# EAGLE board IO4-IR-Detector-Active_array (EAGLE 7.7.0)
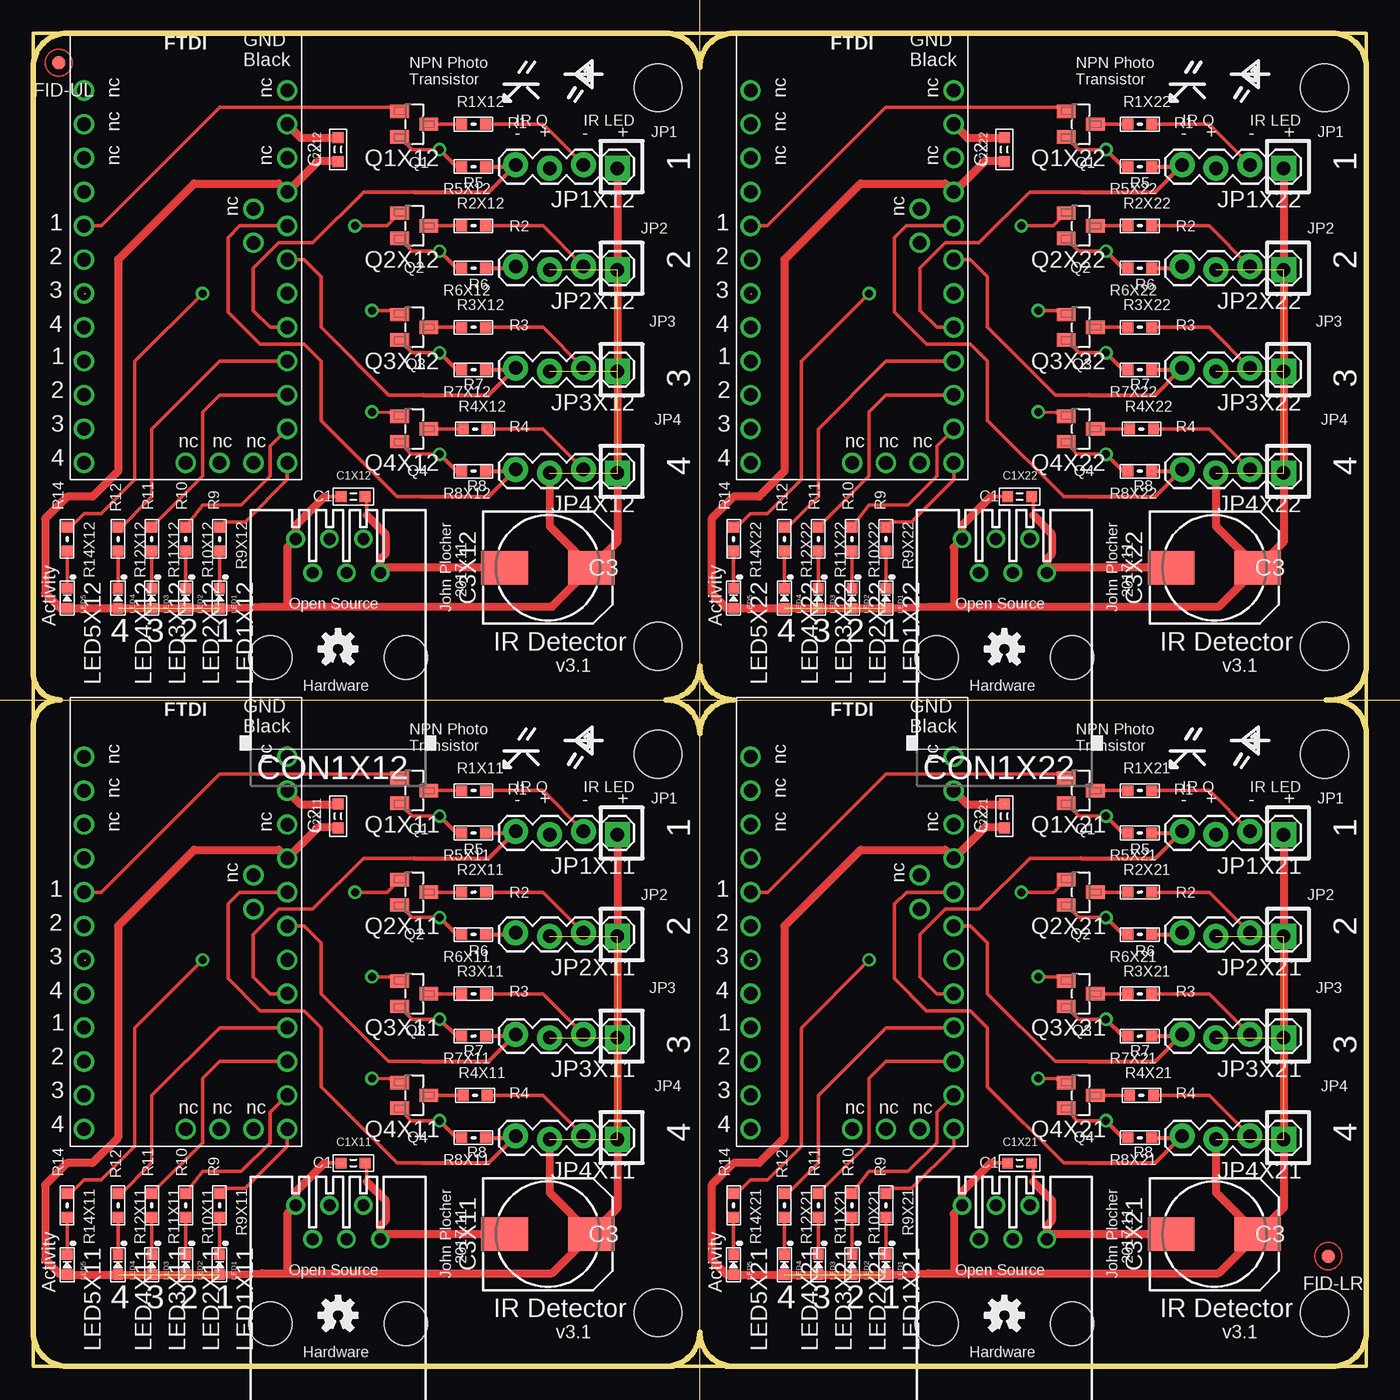
[diagram p0: board, top side]
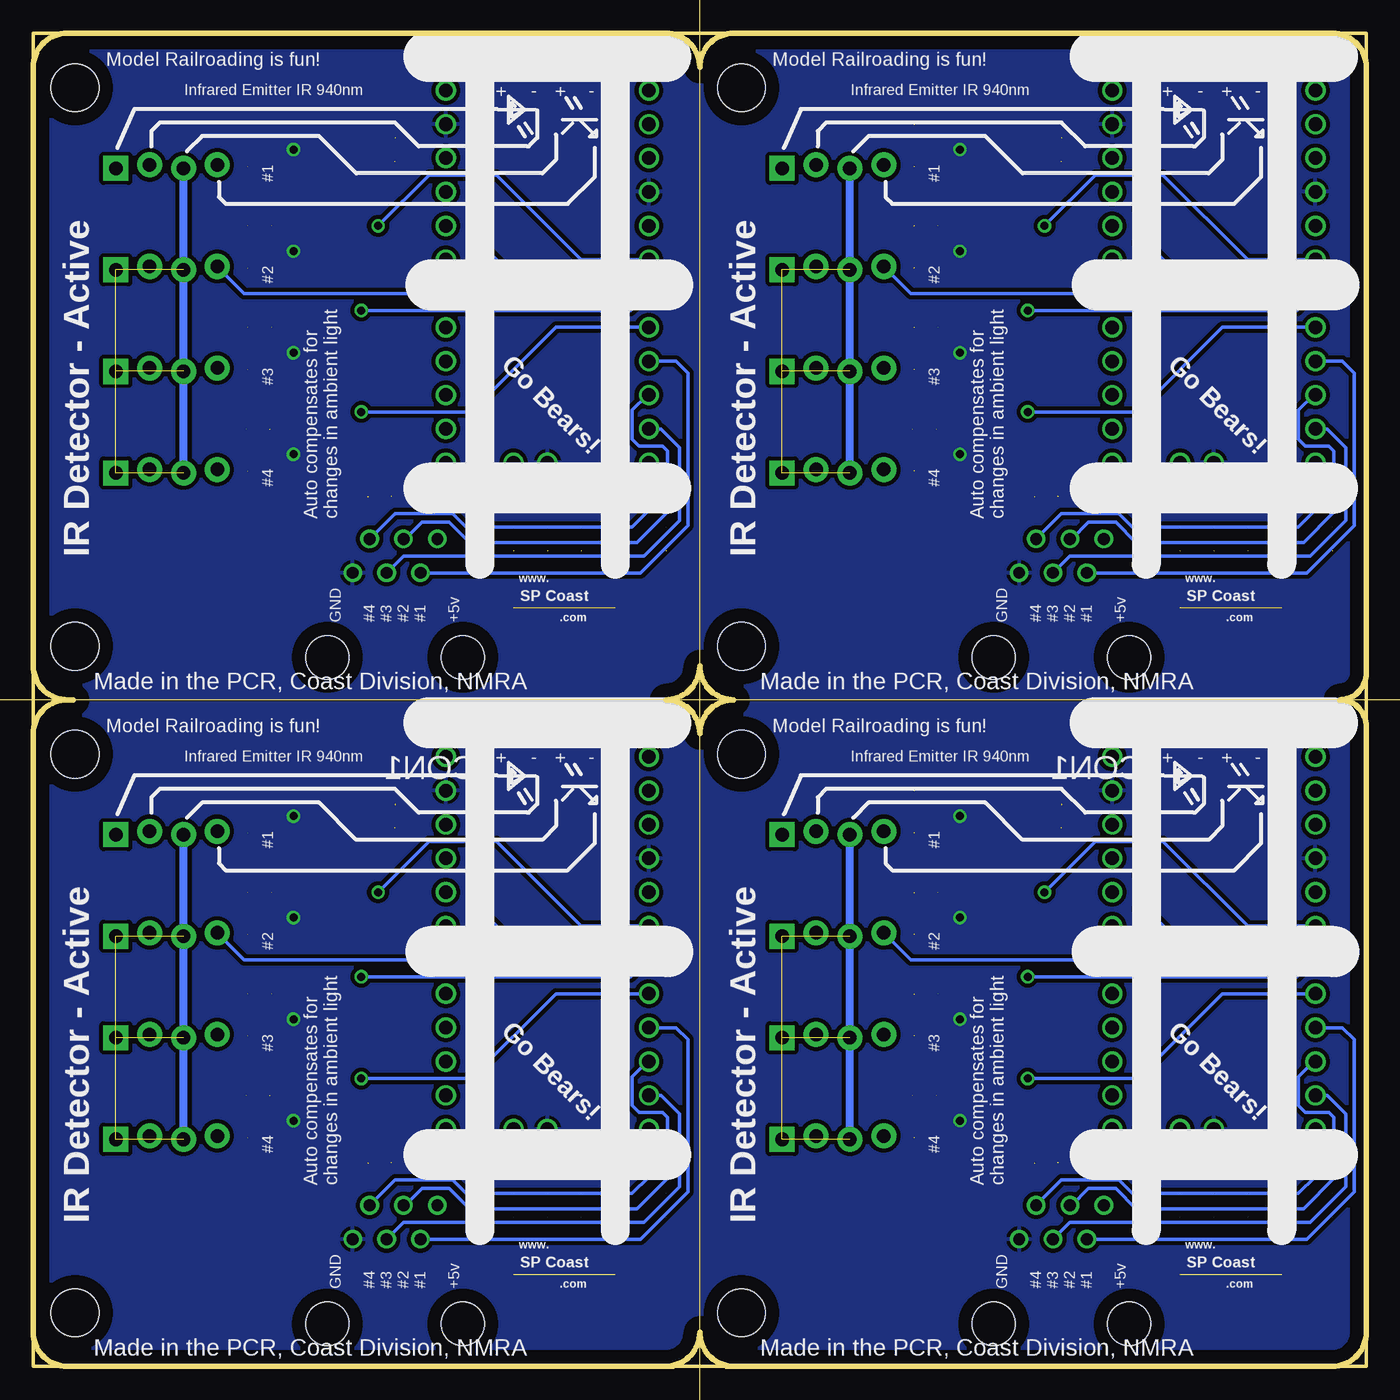
[diagram p1: board, bottom side, seen from below]

Size 100 x 100 mm. Coordinates in mm from the lower left corner, seen from the top.
Outline: 47.46,0 48,0
Outline: 52,0 52.54,0
Outline: 52.54,0 arc-90 50,2.54 arc-90 47.46,0
Outline: 47.46,0 2.54,0 arc-90 0,2.54 0,48 arc-90 2,50 arc-90 0,52 0,97.46 arc-90 2.54,100 47.46,100 arc-90 50,97.46 arc-90 52.54,100 97.46,100 arc-90 100,97.46 100,52.54 arc-90 97.46,50
Outline: 52.54,0 97.46,0 arc90 100,2.54 100,47.46 arc90 97.46,50
Outline: 97,50 97.46,50
Outline: 50,52.54 arc90 52.54,50 arc90 50,47.46 arc90 47.46,50 arc90 50,52.54
Outline: 0,0 100,0 100,100 0,100 0,0
Copper layers (1*16): Top 0.035mm / dielectric 1.5mm / Bottom 0.035mm
Design rules "default": minimum track width 10mil, minimum drill 0.6mm, track to track 8mil, track to pad 8mil, pad to pad 8mil, via to via 8mil, smd to smd 8mil, copper to edge 40mil, drill to drill 8mil, minimum pad ring 10mil, minimum via ring 8mil, stop-mask expansion 4mil, vias tented up to drill 0mil, thermal gap 10mil
Holes 3.6 mm at 46.87,45.92 46.87,4.01 46.87,95.92 46.87,54.01 96.87,45.92 96.87,4.01 96.87,95.92 96.87,54.01
vRestrict: area 0,45.7 to 49.5,49.5; area 0,0 to 49.5,3.8; area 0,95.7 to 49.5,99.5; area 0,50 to 49.5,53.8; area 50,45.7 to 99.5,49.5; area 50,0 to 99.5,3.8; area 50,95.7 to 99.5,99.5; area 50,50 to 99.5,53.8
Milling: 2 lines

## Footprints (pad centres in the part's own frame; a part is rotated, then mirrored left to right if it is on the bottom)
ARDUINO_PRO_MINI_DAVEK = drill 1.016: 5V 16.51,21.59; AD0 16.51,11.43; AD1 16.51,13.97; AD2 16.51,16.51; AD3 16.51,19.05; AD4 13.97,17.78; AD5 13.97,20.32; AD6 11.43,1.27; AD7 13.97,1.27; D2 1.27,19.05; D3 1.27,16.51; D4 1.27,13.97; D5 1.27,11.43; D6 1.27,8.89; D7 1.27,6.35; D8 1.27,3.81; D9 1.27,1.27; D10 16.51,1.27; D11 16.51,3.81; D12 16.51,6.35; D13 16.51,8.89; GND@1 16.51,26.67; GND@2 8.89,1.27; GND@4 1.27,21.59; RES 16.51,24.13; RES@1 1.27,24.13; RX 1.27,26.67; TX@1 1.27,29.21; VIN 16.51,29.21
0603-CAP = smd 0.813 x 0.813: 1 -0.9,0; 2 0.9,0
0810-CAP = smd 3.5 x 2.5: + 3.25,0; - -3.25,0
RJ25-PANEL = drill 0.889: 1 -3.175,8.89; 2 -1.905,6.35; 3 -0.635,8.89; 4 0.635,6.35; 5 1.905,8.89; 6 3.175,6.35 | hole 3.251: -5.08,0; 5.08,0
FIDUCIAL_1MM = smd 1 x 1: 1 0,0
1X04_LOCK = drill 1.016 pad 1.88 square: 1 0,0.127 | drill 1.016 pad 1.88: 2 2.54,-0.127; 3 5.08,0.127; 4 7.62,-0.127
0603-LED = smd 0.8 x 0.8: A 0.75,0; C -0.75,0
SOT23 = smd 1.4 x 1: 1 1.1,-0.95; 2 1.1,0.95; 3 -1.1,0
0603-RES = smd 0.813 x 0.813: 1 -0.9,0; 2 0.9,0

## Placement (x,y rotation side)
ARDUINO1X11  DAVEK  [ARDUINO_PRO_MINI_DAVEK]  2.54,16.51 0 top
ARDUINO1X12  DAVEK  [ARDUINO_PRO_MINI_DAVEK]  2.54,66.51 0 top
ARDUINO1X21  DAVEK  [ARDUINO_PRO_MINI_DAVEK]  52.54,16.51 0 top
ARDUINO1X22  DAVEK  [ARDUINO_PRO_MINI_DAVEK]  52.54,66.51 0 top
C1X11  0.1uF  [0603-CAP]  24,15.24 0 top
C1X12  0.1uF  [0603-CAP]  24,65.24 0 top
C1X21  0.1uF  [0603-CAP]  74,15.24 0 top
C1X22  0.1uF  [0603-CAP]  74,65.24 0 top
C2X11  0.1uF  [0603-CAP]  22.86,41.27 90 top
C2X12  0.1uF  [0603-CAP]  22.86,91.28 90 top
C2X21  0.1uF  [0603-CAP]  72.86,41.27 90 top
C2X22  0.1uF  [0603-CAP]  72.86,91.28 90 top
C3X11  220uF  [0810-CAP]  38.61,9.91 0 top
C3X12  220uF  [0810-CAP]  38.61,59.91 0 top
C3X21  220uF  [0810-CAP]  88.61,9.91 0 top
C3X22  220uF  [0810-CAP]  88.61,59.91 0 top
CON1X11  RJ12/6  [RJ25-PANEL]  22.86,3.17 0 top
CON1X12  RJ12/6  [RJ25-PANEL]  22.86,53.17 0 top
CON1X21  RJ12/6  [RJ25-PANEL]  72.86,3.17 0 top
CON1X22  RJ12/6  [RJ25-PANEL]  72.86,53.17 0 top
FID-LR  [FIDUCIAL_1MM]  97.16,8.26 0 top
FID-UL  [FIDUCIAL_1MM]  1.91,97.79 0 top
JP1X11  0.100  [1X04_LOCK]  43.81,40.01 180 top
JP1X12  0.100  [1X04_LOCK]  43.81,90 180 top
JP1X21  0.100  [1X04_LOCK]  93.81,40.01 180 top
JP1X22  0.100  [1X04_LOCK]  93.81,90 180 top
JP2X11  0.100  [1X04_LOCK]  43.81,32.38 180 top
JP2X12  0.100  [1X04_LOCK]  43.81,82.39 180 top
JP2X21  0.100  [1X04_LOCK]  93.81,32.38 180 top
JP2X22  0.100  [1X04_LOCK]  93.81,82.39 180 top
JP3X11  0.100  [1X04_LOCK]  43.81,24.77 180 top
JP3X12  0.100  [1X04_LOCK]  43.81,74.77 180 top
JP3X21  0.100  [1X04_LOCK]  93.81,24.77 180 top
JP3X22  0.100  [1X04_LOCK]  93.81,74.77 180 top
JP4X11  0.100  [1X04_LOCK]  43.81,17.14 180 top
JP4X12  0.100  [1X04_LOCK]  43.81,67.14 180 top
JP4X21  0.100  [1X04_LOCK]  93.81,17.14 180 top
JP4X22  0.100  [1X04_LOCK]  93.81,67.14 180 top
LED1X11  Y  [0603-LED]  13.97,7.62 270 top
LED1X12  Y  [0603-LED]  13.97,57.62 270 top
LED1X21  Y  [0603-LED]  63.97,7.62 270 top
LED1X22  Y  [0603-LED]  63.97,57.62 270 top
LED2X11  Y  [0603-LED]  11.43,7.62 270 top
LED2X12  Y  [0603-LED]  11.43,57.62 270 top
LED2X21  Y  [0603-LED]  61.43,7.62 270 top
LED2X22  Y  [0603-LED]  61.43,57.62 270 top
LED3X11  Y  [0603-LED]  8.89,7.62 270 top
LED3X12  Y  [0603-LED]  8.89,57.62 270 top
LED3X21  Y  [0603-LED]  58.89,7.62 270 top
LED3X22  Y  [0603-LED]  58.89,57.62 270 top
LED4X11  Y  [0603-LED]  6.35,7.62 270 top
LED4X12  Y  [0603-LED]  6.35,57.62 270 top
LED4X21  Y  [0603-LED]  56.35,7.62 270 top
LED4X22  Y  [0603-LED]  56.35,57.62 270 top
LED5X11  G  [0603-LED]  2.54,7.62 270 top
LED5X12  G  [0603-LED]  2.54,57.62 270 top
LED5X21  G  [0603-LED]  52.54,7.62 270 top
LED5X22  G  [0603-LED]  52.54,57.62 270 top
OSH_LOGOX11  DOC-OSHW-LOGO-S  [OSHW-LOGO-S]  22.86,3.81 0 top
OSH_LOGOX12  DOC-OSHW-LOGO-S  [OSHW-LOGO-S]  22.86,53.81 0 top
OSH_LOGOX21  DOC-OSHW-LOGO-S  [OSHW-LOGO-S]  72.86,3.81 0 top
OSH_LOGOX22  DOC-OSHW-LOGO-S  [OSHW-LOGO-S]  72.86,53.81 0 top
Q1X11  NPN-2222  [SOT23]  28.57,43.18 180 top
Q1X12  NPN-2222  [SOT23]  28.57,93.18 180 top
Q1X21  NPN-2222  [SOT23]  78.58,43.18 180 top
Q1X22  NPN-2222  [SOT23]  78.58,93.18 180 top
Q2X11  NPN-2222  [SOT23]  28.57,35.56 180 top
Q2X12  NPN-2222  [SOT23]  28.57,85.56 180 top
Q2X21  NPN-2222  [SOT23]  78.58,35.56 180 top
Q2X22  NPN-2222  [SOT23]  78.58,85.56 180 top
Q3X11  NPN-2222  [SOT23]  28.57,27.94 180 top
Q3X12  NPN-2222  [SOT23]  28.57,77.94 180 top
Q3X21  NPN-2222  [SOT23]  78.58,27.94 180 top
Q3X22  NPN-2222  [SOT23]  78.58,77.94 180 top
Q4X11  NPN-2222  [SOT23]  28.57,20.32 180 top
Q4X12  NPN-2222  [SOT23]  28.57,70.32 180 top
Q4X21  NPN-2222  [SOT23]  78.58,20.32 180 top
Q4X22  NPN-2222  [SOT23]  78.58,70.32 180 top
R1X11  330R  [0603-RES]  33.02,43.18 0 top
R1X12  330R  [0603-RES]  33.02,93.18 0 top
R1X21  330R  [0603-RES]  83.02,43.18 0 top
R1X22  330R  [0603-RES]  83.02,93.18 0 top
R2X11  330R  [0603-RES]  33.02,35.56 0 top
R2X12  330R  [0603-RES]  33.02,85.56 0 top
R2X21  330R  [0603-RES]  83.02,35.56 0 top
R2X22  330R  [0603-RES]  83.02,85.56 0 top
R3X11  330R  [0603-RES]  33.02,27.94 0 top
R3X12  330R  [0603-RES]  33.02,77.94 0 top
R3X21  330R  [0603-RES]  83.02,27.94 0 top
R3X22  330R  [0603-RES]  83.02,77.94 0 top
R4X11  330R  [0603-RES]  33.15,20.32 0 top
R4X12  330R  [0603-RES]  33.15,70.32 0 top
R4X21  330R  [0603-RES]  83.15,20.32 0 top
R4X22  330R  [0603-RES]  83.15,70.32 0 top
R5X11  100K  [0603-RES]  33.02,40.01 180 top
R5X12  100K  [0603-RES]  33.02,90 180 top
R5X21  100K  [0603-RES]  83.02,40.01 180 top
R5X22  100K  [0603-RES]  83.02,90 180 top
R6X11  100K  [0603-RES]  33.02,32.38 180 top
R6X12  100K  [0603-RES]  33.02,82.39 180 top
R6X21  100K  [0603-RES]  83.02,32.38 180 top
R6X22  100K  [0603-RES]  83.02,82.39 180 top
R7X11  100K  [0603-RES]  33.02,24.77 180 top
R7X12  100K  [0603-RES]  33.02,74.77 180 top
R7X21  100K  [0603-RES]  83.02,24.77 180 top
R7X22  100K  [0603-RES]  83.02,74.77 180 top
R8X11  100K  [0603-RES]  33.02,17.14 180 top
R8X12  100K  [0603-RES]  33.02,67.14 180 top
R8X21  100K  [0603-RES]  83.02,17.14 180 top
R8X22  100K  [0603-RES]  83.02,67.14 180 top
R9X11  2k0  [0603-RES]  13.97,12.06 270 top
R9X12  2k0  [0603-RES]  13.97,62.06 270 top
R9X21  2k0  [0603-RES]  63.97,12.06 270 top
R9X22  2k0  [0603-RES]  63.97,62.06 270 top
R10X11  2k0  [0603-RES]  11.43,12.06 270 top
R10X12  2k0  [0603-RES]  11.43,62.06 270 top
R10X21  2k0  [0603-RES]  61.43,12.06 270 top
R10X22  2k0  [0603-RES]  61.43,62.06 270 top
R11X11  2k0  [0603-RES]  8.89,12.06 270 top
R11X12  2k0  [0603-RES]  8.89,62.06 270 top
R11X21  2k0  [0603-RES]  58.89,12.06 270 top
R11X22  2k0  [0603-RES]  58.89,62.06 270 top
R12X11  2k0  [0603-RES]  6.35,12.06 270 top
R12X12  2k0  [0603-RES]  6.35,62.06 270 top
R12X21  2k0  [0603-RES]  56.35,12.06 270 top
R12X22  2k0  [0603-RES]  56.35,62.06 270 top
R14X11  5k0  [0603-RES]  2.54,12.06 270 top
R14X12  5k0  [0603-RES]  2.54,62.06 270 top
R14X21  5k0  [0603-RES]  52.54,12.06 270 top
R14X22  5k0  [0603-RES]  52.54,62.06 270 top

## Library data of the parts
ARDUINO1X11 ARDUINO1X12 ARDUINO1X21 ARDUINO1X22 C1X11 C1X12 C1X21 C1X22 C2X11 C2X12 C2X21 C2X22 C3X11 C3X12 C3X21 C3X22 CON1X11 CON1X12 CON1X21 CON1X22 FID-LR FID-UL JP1X11 JP1X12 JP1X21 JP1X22 JP2X11 JP2X12 JP2X21 JP2X22 JP3X11 JP3X12 JP3X21 JP3X22 JP4X11 JP4X12 JP4X21 JP4X22 LED1X11 LED1X12 LED1X21 LED1X22 LED2X11 LED2X12 LED2X21 LED2X22 LED3X11 LED3X12 LED3X21 LED3X22 LED4X11 LED4X12 LED4X21 LED4X22 LED5X11 LED5X12 LED5X21 LED5X22 OSH_LOGOX11 OSH_LOGOX12 OSH_LOGOX21 OSH_LOGOX22 Q1X11 Q1X12 Q1X21 Q1X22 Q2X11 Q2X12 Q2X21 Q2X22 Q3X11 Q3X12 Q3X21 Q3X22 Q4X11 Q4X12 Q4X21 Q4X22 R1X11 R1X12 R1X21 R1X22 R2X11 R2X12 R2X21 R2X22 R3X11 R3X12 R3X21 R3X22 R4X11 R4X12 R4X21 R4X22 R5X11 R5X12 R5X21 R5X22 R6X11 R6X12 R6X21 R6X22 R7X11 R7X12 R7X21 R7X22 R8X11 R8X12 R8X21 R8X22 R9X11 R9X12 R9X21 R9X22 R10X11 R10X12 R10X21 R10X22 R11X11 R11X12 R11X21 R11X22 R12X11 R12X12 R12X21 R12X22 R14X11 R14X12 R14X21 R14X22 = SPCoast

## Nets
!ACTIVITYX11: ARDUINO1X11.AD4 R14X11.1
!ACTIVITYX12: ARDUINO1X12.AD4 R14X12.1
!ACTIVITYX21: ARDUINO1X21.AD4 R14X21.1
!ACTIVITYX22: ARDUINO1X22.AD4 R14X22.1
GNDX11: ARDUINO1X11.GND@1 ARDUINO1X11.GND@2 ARDUINO1X11.GND@4 C1X11.2 C2X11.2 C3X11.- CON1X11.6 Q1X11.2 Q2X11.2 Q3X11.2 Q4X11.2 R5X11.2 R6X11.2 R7X11.2 R8X11.2
GNDX12: ARDUINO1X12.GND@1 ARDUINO1X12.GND@2 ARDUINO1X12.GND@4 C1X12.2 C2X12.2 C3X12.- CON1X12.6 Q1X12.2 Q2X12.2 Q3X12.2 Q4X12.2 R5X12.2 R6X12.2 R7X12.2 R8X12.2
GNDX21: ARDUINO1X21.GND@1 ARDUINO1X21.GND@2 ARDUINO1X21.GND@4 C1X21.2 C2X21.2 C3X21.- CON1X21.6 Q1X21.2 Q2X21.2 Q3X21.2 Q4X21.2 R5X21.2 R6X21.2 R7X21.2 R8X21.2
GNDX22: ARDUINO1X22.GND@1 ARDUINO1X22.GND@2 ARDUINO1X22.GND@4 C1X22.2 C2X22.2 C3X22.- CON1X22.6 Q1X22.2 Q2X22.2 Q3X22.2 Q4X22.2 R5X22.2 R6X22.2 R7X22.2 R8X22.2
IR1X11: ARDUINO1X11.D2 Q1X11.1
IR1X12: ARDUINO1X12.D2 Q1X12.1
IR1X21: ARDUINO1X21.D2 Q1X21.1
IR1X22: ARDUINO1X22.D2 Q1X22.1
IR2X11: ARDUINO1X11.D3 Q2X11.1
IR2X12: ARDUINO1X12.D3 Q2X12.1
IR2X21: ARDUINO1X21.D3 Q2X21.1
IR2X22: ARDUINO1X22.D3 Q2X22.1
IR3X11: ARDUINO1X11.D4 Q3X11.1
IR3X12: ARDUINO1X12.D4 Q3X12.1
IR3X21: ARDUINO1X21.D4 Q3X21.1
IR3X22: ARDUINO1X22.D4 Q3X22.1
IR4X11: ARDUINO1X11.D5 Q4X11.1
IR4X12: ARDUINO1X12.D5 Q4X12.1
IR4X21: ARDUINO1X21.D5 Q4X21.1
IR4X22: ARDUINO1X22.D5 Q4X22.1
IRDRIVE1X11: Q1X11.3 R1X11.1
IRDRIVE1X12: Q1X12.3 R1X12.1
IRDRIVE1X21: Q1X21.3 R1X21.1
IRDRIVE1X22: Q1X22.3 R1X22.1
IRDRIVE2X11: Q2X11.3 R2X11.1
IRDRIVE2X12: Q2X12.3 R2X12.1
IRDRIVE2X21: Q2X21.3 R2X21.1
IRDRIVE2X22: Q2X22.3 R2X22.1
IRDRIVE3X11: Q3X11.3 R3X11.1
IRDRIVE3X12: Q3X12.3 R3X12.1
IRDRIVE3X21: Q3X21.3 R3X21.1
IRDRIVE3X22: Q3X22.3 R3X22.1
IRDRIVE4X11: Q4X11.3 R4X11.1
IRDRIVE4X12: Q4X12.3 R4X12.1
IRDRIVE4X21: Q4X21.3 R4X21.1
IRDRIVE4X22: Q4X22.3 R4X22.1
IRSIG1X11: ARDUINO1X11.AD0 JP1X11.4 R5X11.1
IRSIG1X12: ARDUINO1X12.AD0 JP1X12.4 R5X12.1
IRSIG1X21: ARDUINO1X21.AD0 JP1X21.4 R5X21.1
IRSIG1X22: ARDUINO1X22.AD0 JP1X22.4 R5X22.1
IRSIG2X11: ARDUINO1X11.AD1 JP2X11.4 R6X11.1
IRSIG2X12: ARDUINO1X12.AD1 JP2X12.4 R6X12.1
IRSIG2X21: ARDUINO1X21.AD1 JP2X21.4 R6X21.1
IRSIG2X22: ARDUINO1X22.AD1 JP2X22.4 R6X22.1
IRSIG3X11: ARDUINO1X11.AD2 JP3X11.4 R7X11.1
IRSIG3X12: ARDUINO1X12.AD2 JP3X12.4 R7X12.1
IRSIG3X21: ARDUINO1X21.AD2 JP3X21.4 R7X21.1
IRSIG3X22: ARDUINO1X22.AD2 JP3X22.4 R7X22.1
IRSIG4X11: ARDUINO1X11.AD3 JP4X11.4 R8X11.1
IRSIG4X12: ARDUINO1X12.AD3 JP4X12.4 R8X12.1
IRSIG4X21: ARDUINO1X21.AD3 JP4X21.4 R8X21.1
IRSIG4X22: ARDUINO1X22.AD3 JP4X22.4 R8X22.1
L1X11: ARDUINO1X11.D10 R9X11.1
L1X12: ARDUINO1X12.D10 R9X12.1
L1X21: ARDUINO1X21.D10 R9X21.1
L1X22: ARDUINO1X22.D10 R9X22.1
L2X11: ARDUINO1X11.D11 R10X11.1
L2X12: ARDUINO1X12.D11 R10X12.1
L2X21: ARDUINO1X21.D11 R10X21.1
L2X22: ARDUINO1X22.D11 R10X22.1
L3X11: ARDUINO1X11.D12 R11X11.1
L3X12: ARDUINO1X12.D12 R11X12.1
L3X21: ARDUINO1X21.D12 R11X21.1
L3X22: ARDUINO1X22.D12 R11X22.1
L4X11: ARDUINO1X11.D13 R12X11.1
L4X12: ARDUINO1X12.D13 R12X12.1
L4X21: ARDUINO1X21.D13 R12X21.1
L4X22: ARDUINO1X22.D13 R12X22.1
N$1X11: LED5X11.C R14X11.2
N$1X12: LED5X12.C R14X12.2
N$1X21: LED5X21.C R14X21.2
N$1X22: LED5X22.C R14X22.2
N$2X11: JP1X11.2 R1X11.2
N$2X12: JP1X12.2 R1X12.2
N$2X21: JP1X21.2 R1X21.2
N$2X22: JP1X22.2 R1X22.2
N$3X11: JP2X11.2 R2X11.2
N$3X12: JP2X12.2 R2X12.2
N$3X21: JP2X21.2 R2X21.2
N$3X22: JP2X22.2 R2X22.2
N$4X11: JP3X11.2 R3X11.2
N$4X12: JP3X12.2 R3X12.2
N$4X21: JP3X21.2 R3X21.2
N$4X22: JP3X22.2 R3X22.2
N$5X11: JP4X11.2 R4X11.2
N$5X12: JP4X12.2 R4X12.2
N$5X21: JP4X21.2 R4X21.2
N$5X22: JP4X22.2 R4X22.2
N$10X11: LED1X11.C R9X11.2
N$10X12: LED1X12.C R9X12.2
N$10X21: LED1X21.C R9X21.2
N$10X22: LED1X22.C R9X22.2
N$11X11: LED2X11.C R10X11.2
N$11X12: LED2X12.C R10X12.2
N$11X21: LED2X21.C R10X21.2
N$11X22: LED2X22.C R10X22.2
N$12X11: LED3X11.C R11X11.2
N$12X12: LED3X12.C R11X12.2
N$12X21: LED3X21.C R11X21.2
N$12X22: LED3X22.C R11X22.2
N$13X11: LED4X11.C R12X11.2
N$13X12: LED4X12.C R12X12.2
N$13X21: LED4X21.C R12X21.2
N$13X22: LED4X22.C R12X22.2
T1X11: ARDUINO1X11.D6 CON1X11.2
T1X12: ARDUINO1X12.D6 CON1X12.2
T1X21: ARDUINO1X21.D6 CON1X21.2
T1X22: ARDUINO1X22.D6 CON1X22.2
T2X11: ARDUINO1X11.D7 CON1X11.3
T2X12: ARDUINO1X12.D7 CON1X12.3
T2X21: ARDUINO1X21.D7 CON1X21.3
T2X22: ARDUINO1X22.D7 CON1X22.3
T3X11: ARDUINO1X11.D8 CON1X11.4
T3X12: ARDUINO1X12.D8 CON1X12.4
T3X21: ARDUINO1X21.D8 CON1X21.4
T3X22: ARDUINO1X22.D8 CON1X22.4
T4X11: ARDUINO1X11.D9 CON1X11.5
T4X12: ARDUINO1X12.D9 CON1X12.5
T4X21: ARDUINO1X21.D9 CON1X21.5
T4X22: ARDUINO1X22.D9 CON1X22.5
VCCX11: ARDUINO1X11.5V C1X11.1 C2X11.1 C3X11.+ CON1X11.1 JP1X11.1 JP1X11.3 JP2X11.1 JP2X11.3 JP3X11.1 JP3X11.3 JP4X11.1 JP4X11.3 LED1X11.A LED2X11.A LED3X11.A LED4X11.A LED5X11.A
VCCX12: ARDUINO1X12.5V C1X12.1 C2X12.1 C3X12.+ CON1X12.1 JP1X12.1 JP1X12.3 JP2X12.1 JP2X12.3 JP3X12.1 JP3X12.3 JP4X12.1 JP4X12.3 LED1X12.A LED2X12.A LED3X12.A LED4X12.A LED5X12.A
VCCX21: ARDUINO1X21.5V C1X21.1 C2X21.1 C3X21.+ CON1X21.1 JP1X21.1 JP1X21.3 JP2X21.1 JP2X21.3 JP3X21.1 JP3X21.3 JP4X21.1 JP4X21.3 LED1X21.A LED2X21.A LED3X21.A LED4X21.A LED5X21.A
VCCX22: ARDUINO1X22.5V C1X22.1 C2X22.1 C3X22.+ CON1X22.1 JP1X22.1 JP1X22.3 JP2X22.1 JP2X22.3 JP3X22.1 JP3X22.3 JP4X22.1 JP4X22.3 LED1X22.A LED2X22.A LED3X22.A LED4X22.A LED5X22.A

## Tracks (layer width: path | path; a pad name or v marks a point on that pad's centre or on a via)
!ACTIVITYX11  (via drill 0.6 pad 0.9)  (1 unrouted)
  Top 0.254: v12.7,30.48 7.62,25.4 7.62,16.51 5.08,13.97 3.81,13.97 2.79,12.95 R14X11.1
  Bottom 0.254: v12.7,30.48 ARDUINO1X11.AD4
!ACTIVITYX12  (via drill 0.6 pad 0.9)  (1 unrouted)
  Top 0.254: v12.7,80.48 7.62,75.4 7.62,66.51 5.08,63.97 3.81,63.97 2.79,62.95 R14X12.1
  Bottom 0.254: v12.7,80.48 ARDUINO1X12.AD4
!ACTIVITYX21  (via drill 0.6 pad 0.9)  (1 unrouted)
  Top 0.254: v62.7,30.48 57.62,25.4 57.62,16.51 55.08,13.97 53.81,13.97 52.79,12.95 R14X21.1
  Bottom 0.254: v62.7,30.48 ARDUINO1X21.AD4
!ACTIVITYX22  (via drill 0.6 pad 0.9)  (1 unrouted)
  Top 0.254: v62.7,80.48 57.62,75.4 57.62,66.51 55.08,63.97 53.81,63.97 52.79,62.95 R14X22.1
  Bottom 0.254: v62.7,80.48 ARDUINO1X22.AD4
GNDX11  (via drill 0.6 pad 0.9)  (6 unrouted)
  Top 0.254: 24.85,15.24 25.02,15.12 25.02,13.84 | 26.42,9.91 CON1X11.6 | 27.69,19.03 Q4X11.2 28.3,18.41 v30.48,18.41 | v30.48,41.27 28.43,41.27 Q1X11.2 | v30.48,33.66 28.43,33.66 Q2X11.2 | v30.48,26.04 28.43,26.04 Q3X11.2
  Top 0.305: R5X11.2 31.75,40.01 v30.48,41.27 | R6X11.2 31.75,32.38 v30.48,33.66 | R7X11.2 31.75,24.77 v30.48,26.04 | R8X11.2 31.75,17.14 v30.48,18.41
  Top 0.61: 25.02,13.84 26.42,12.45 26.42,10.92 26.04,10.54 CON1X11.6 | C3X11.- 26.42,9.91 | 22.86,42.12 20.11,42.12 ARDUINO1X11.GND@1
  pour Bottom (isolate 0.305): 1.02,49.73 49.03,49.73 50.3,48.46 50.3,1.47 49.03,0.2 1.02,0.2 -0.25,1.47 -0.25,48.46
GNDX12  (via drill 0.6 pad 0.9)  (6 unrouted)
  Top 0.254: 24.85,65.24 25.02,65.12 25.02,63.84 | 26.42,59.91 CON1X12.6 | 27.69,69.03 Q4X12.2 28.3,68.42 v30.48,68.42 | v30.48,91.28 28.43,91.28 Q1X12.2 | v30.48,83.66 28.43,83.66 Q2X12.2 | v30.48,76.03 28.43,76.03 Q3X12.2
  Top 0.305: R5X12.2 31.75,90 v30.48,91.28 | R6X12.2 31.75,82.39 v30.48,83.66 | R7X12.2 31.75,74.77 v30.48,76.03 | R8X12.2 31.75,67.14 v30.48,68.42
  Top 0.61: 25.02,63.84 26.42,62.45 26.42,60.92 26.04,60.54 CON1X12.6 | C3X12.- 26.42,59.91 | 22.86,92.12 20.11,92.12 ARDUINO1X12.GND@1
  pour Bottom (isolate 0.305): 1.02,99.73 49.03,99.73 50.3,98.46 50.3,51.47 49.03,50.2 1.02,50.2 -0.25,51.47 -0.25,98.46
GNDX21  (via drill 0.6 pad 0.9)  (6 unrouted)
  Top 0.254: 74.85,15.24 75.02,15.12 75.02,13.84 | 76.42,9.91 CON1X21.6 | 77.69,19.03 Q4X21.2 78.3,18.41 v80.48,18.41 | v80.48,41.27 78.43,41.27 Q1X21.2 | v80.48,33.66 78.43,33.66 Q2X21.2 | v80.48,26.04 78.43,26.04 Q3X21.2
  Top 0.305: R5X21.2 81.75,40.01 v80.48,41.27 | R6X21.2 81.75,32.38 v80.48,33.66 | R7X21.2 81.75,24.77 v80.48,26.04 | R8X21.2 81.75,17.14 v80.48,18.41
  Top 0.61: 75.02,13.84 76.42,12.45 76.42,10.92 76.03,10.54 CON1X21.6 | C3X21.- 76.42,9.91 | 72.86,42.12 70.11,42.12 ARDUINO1X21.GND@1
  pour Bottom (isolate 0.305): 51.02,49.73 99.03,49.73 100.3,48.46 100.3,1.47 99.03,0.2 51.02,0.2 49.75,1.47 49.75,48.46
GNDX22  (via drill 0.6 pad 0.9)  (6 unrouted)
  Top 0.254: 74.85,65.24 75.02,65.12 75.02,63.84 | 76.42,59.91 CON1X22.6 | 77.69,69.03 Q4X22.2 78.3,68.42 v80.48,68.42 | v80.48,91.28 78.43,91.28 Q1X22.2 | v80.48,83.66 78.43,83.66 Q2X22.2 | v80.48,76.03 78.43,76.03 Q3X22.2
  Top 0.305: R5X22.2 81.75,90 v80.48,91.28 | R6X22.2 81.75,82.39 v80.48,83.66 | R7X22.2 81.75,74.77 v80.48,76.03 | R8X22.2 81.75,67.14 v80.48,68.42
  Top 0.61: 75.02,63.84 76.42,62.45 76.42,60.92 76.03,60.54 CON1X22.6 | C3X22.- 76.42,59.91 | 72.86,92.12 70.11,92.12 ARDUINO1X22.GND@1
  pour Bottom (isolate 0.305): 51.02,99.73 99.03,99.73 100.3,98.46 100.3,51.47 99.03,50.2 51.02,50.2 49.75,51.47 49.75,98.46
IR1X11
  Top 0.254: ARDUINO1X11.D2 5.08,35.56 13.97,44.45 27.16,44.45 Q1X11.1
IR1X12
  Top 0.254: ARDUINO1X12.D2 5.08,85.56 13.97,94.45 27.16,94.45 Q1X12.1
IR1X21
  Top 0.254: ARDUINO1X21.D2 55.08,35.56 63.97,44.45 77.16,44.45 Q1X21.1
IR1X22
  Top 0.254: ARDUINO1X22.D2 55.08,85.56 63.97,94.45 77.16,94.45 Q1X22.1
IR2X11  (via drill 0.6 pad 0.9)
  Top 0.254: v24.13,35.56 26.52,35.56 Q2X11.1
  Bottom 0.254: ARDUINO1X11.D3 8.89,33.02 15.24,39.37 20.32,39.37 v24.13,35.56
IR2X12  (via drill 0.6 pad 0.9)
  Top 0.254: v24.13,85.56 26.52,85.56 Q2X12.1
  Bottom 0.254: ARDUINO1X12.D3 8.89,83.02 15.24,89.37 20.32,89.37 v24.13,85.56
IR2X21  (via drill 0.6 pad 0.9)
  Top 0.254: v74.13,35.56 76.53,35.56 Q2X21.1
  Bottom 0.254: ARDUINO1X21.D3 58.89,33.02 65.24,39.37 70.32,39.37 v74.13,35.56
IR2X22  (via drill 0.6 pad 0.9)
  Top 0.254: v74.13,85.56 76.53,85.56 Q2X22.1
  Bottom 0.254: ARDUINO1X22.D3 58.89,83.02 65.24,89.37 70.32,89.37 v74.13,85.56
IR3X11  (via drill 0.6 pad 0.9)  (1 unrouted)
  Top 0.254: v25.4,29.21 27.48,29.21 Q3X11.1
  Bottom 0.254: 3.94,30.48 5.21,29.21 v25.4,29.21
IR3X12  (via drill 0.6 pad 0.9)  (1 unrouted)
  Top 0.254: v25.4,79.21 27.48,79.21 Q3X12.1
  Bottom 0.254: 3.94,80.48 5.21,79.21 v25.4,79.21
IR3X21  (via drill 0.6 pad 0.9)  (1 unrouted)
  Top 0.254: v75.4,29.21 77.47,29.21 Q3X21.1
  Bottom 0.254: 53.94,30.48 55.21,29.21 v75.4,29.21
IR3X22  (via drill 0.6 pad 0.9)  (1 unrouted)
  Top 0.254: v75.4,79.21 77.47,79.21 Q3X22.1
  Bottom 0.254: 53.94,80.48 55.21,79.21 v75.4,79.21
IR4X11  (via drill 0.6 pad 0.9)
  Top 0.254: v25.4,21.59 26.71,21.55 Q4X11.1
  Bottom 0.254: ARDUINO1X11.D5 10.79,27.94 17.14,21.59 v25.4,21.59
IR4X12  (via drill 0.6 pad 0.9)
  Top 0.254: v25.4,71.59 26.71,71.55 Q4X12.1
  Bottom 0.254: ARDUINO1X12.D5 10.79,77.94 17.14,71.59 v25.4,71.59
IR4X21  (via drill 0.6 pad 0.9)
  Top 0.254: v75.4,21.59 76.71,21.55 Q4X21.1
  Bottom 0.254: ARDUINO1X21.D5 60.8,27.94 67.14,21.59 v75.4,21.59
IR4X22  (via drill 0.6 pad 0.9)
  Top 0.254: v75.4,71.59 76.71,71.55 Q4X22.1
  Bottom 0.254: ARDUINO1X22.D5 60.8,77.94 67.14,71.59 v75.4,71.59
IRDRIVE1X11  (1 unrouted)
  Top 0.254: Q1X11.3 R1X11.1
IRDRIVE1X12  (1 unrouted)
  Top 0.254: Q1X12.3 R1X12.1
IRDRIVE1X21  (1 unrouted)
  Top 0.254: Q1X21.3 R1X21.1
IRDRIVE1X22  (1 unrouted)
  Top 0.254: Q1X22.3 R1X22.1
IRDRIVE2X11  (1 unrouted)
  Top 0.254: Q2X11.3 R2X11.1
IRDRIVE2X12  (1 unrouted)
  Top 0.254: Q2X12.3 R2X12.1
IRDRIVE2X21  (1 unrouted)
  Top 0.254: Q2X21.3 R2X21.1
IRDRIVE2X22  (1 unrouted)
  Top 0.254: Q2X22.3 R2X22.1
IRDRIVE3X11  (1 unrouted)
  Top 0.254: Q3X11.3 R3X11.1
IRDRIVE3X12  (1 unrouted)
  Top 0.254: Q3X12.3 R3X12.1
IRDRIVE3X21  (1 unrouted)
  Top 0.254: Q3X21.3 R3X21.1
IRDRIVE3X22  (1 unrouted)
  Top 0.254: Q3X22.3 R3X22.1
IRDRIVE4X11  (1 unrouted)
  Top 0.254: Q4X11.3 R4X11.1
IRDRIVE4X12  (1 unrouted)
  Top 0.254: Q4X12.3 R4X12.1
IRDRIVE4X21  (1 unrouted)
  Top 0.254: Q4X21.3 R4X21.1
IRDRIVE4X22  (1 unrouted)
  Top 0.254: Q4X22.3 R4X22.1
IRSIG1X11  (1 unrouted)
  Top 0.254: ARDUINO1X11.AD0 17.78,27.94 16.51,29.21 16.51,32.38 18.41,34.29 20.95,34.29 24.77,38.1 28.57,38.1
  Top 0.305: 33.91,40.01 36.07,40.01 | 36.07,40.01 JP1X11.4 | 28.57,38.1 34.16,38.1 36.07,40.01
IRSIG1X12  (1 unrouted)
  Top 0.254: ARDUINO1X12.AD0 17.78,77.94 16.51,79.21 16.51,82.39 18.41,84.29 20.95,84.29 24.77,88.1 28.57,88.1
  Top 0.305: 33.91,90 36.07,90 | 36.07,90 JP1X12.4 | 28.57,88.1 34.16,88.1 36.07,90
IRSIG1X21  (1 unrouted)
  Top 0.254: ARDUINO1X21.AD0 67.78,27.94 66.51,29.21 66.51,32.38 68.42,34.29 70.95,34.29 74.77,38.1 78.58,38.1
  Top 0.305: R5X21.1 86.07,40.01 | 86.07,40.01 JP1X21.4 | 78.58,38.1 84.16,38.1 86.07,40.01
IRSIG1X22  (1 unrouted)
  Top 0.254: ARDUINO1X22.AD0 67.78,77.94 66.51,79.21 66.51,82.39 68.42,84.29 70.95,84.29 74.77,88.1 78.58,88.1
  Top 0.305: R5X22.1 86.07,90 | 86.07,90 JP1X22.4 | 78.58,88.1 84.16,88.1 86.07,90
IRSIG2X11  (1 unrouted)
  Top 0.305: 33.91,32.38 36.07,32.38 JP2X11.4
  Bottom 0.254: ARDUINO1X11.AD1 34.16,30.48 JP2X11.4
IRSIG2X12  (1 unrouted)
  Top 0.305: 33.91,82.39 36.07,82.39 JP2X12.4
  Bottom 0.254: ARDUINO1X12.AD1 34.16,80.48 JP2X12.4
IRSIG2X21  (1 unrouted)
  Top 0.305: R6X21.1 86.07,32.38 JP2X21.4
  Bottom 0.254: ARDUINO1X21.AD1 84.16,30.48 JP2X21.4
IRSIG2X22  (1 unrouted)
  Top 0.305: R6X22.1 86.07,82.39 JP2X22.4
  Bottom 0.254: ARDUINO1X22.AD1 84.16,80.48 JP2X22.4
IRSIG3X11  (1 unrouted)
  Top 0.254: ARDUINO1X11.AD2 20.32,33.02 21.59,31.75 21.59,27.94 26.67,22.86 29.21,22.86
  Top 0.305: 33.91,24.77 36.07,24.77 | 36.07,24.77 JP3X11.4 | 29.21,22.86 34.16,22.86 36.07,24.77
IRSIG3X12  (1 unrouted)
  Top 0.254: ARDUINO1X12.AD2 20.32,83.02 21.59,81.75 21.59,77.94 26.67,72.86 29.21,72.86
  Top 0.305: 33.91,74.77 36.07,74.77 | 36.07,74.77 JP3X12.4 | 29.21,72.86 34.16,72.86 36.07,74.77
IRSIG3X21  (1 unrouted)
  Top 0.254: ARDUINO1X21.AD2 70.32,33.02 71.59,31.75 71.59,27.94 76.67,22.86 79.21,22.86
  Top 0.305: R7X21.1 86.07,24.77 | 86.07,24.77 JP3X21.4 | 79.21,22.86 84.16,22.86 86.07,24.77
IRSIG3X22  (1 unrouted)
  Top 0.254: ARDUINO1X22.AD2 70.32,83.02 71.59,81.75 71.59,77.94 76.67,72.86 79.21,72.86
  Top 0.305: R7X22.1 86.07,74.77 | 86.07,74.77 JP3X22.4 | 79.21,72.86 84.16,72.86 86.07,74.77
IRSIG4X11  (1 unrouted)
  Top 0.254: ARDUINO1X11.AD3 15.49,35.56 14.61,34.67 14.61,29.08 17.02,26.67 20.32,26.67 21.59,25.4 21.59,20.95 27.3,15.24 29.21,15.24
  Top 0.305: 33.91,17.14 36.07,17.14 | 36.07,17.14 JP4X11.4 | 29.21,15.24 34.16,15.24 36.07,17.14
IRSIG4X12  (1 unrouted)
  Top 0.254: ARDUINO1X12.AD3 15.49,85.56 14.61,84.67 14.61,79.08 17.02,76.67 20.32,76.67 21.59,75.4 21.59,70.95 27.3,65.24 29.21,65.24
  Top 0.305: 33.91,67.14 36.07,67.14 | 36.07,67.14 JP4X12.4 | 29.21,65.24 34.16,65.24 36.07,67.14
IRSIG4X21  (1 unrouted)
  Top 0.254: ARDUINO1X21.AD3 65.49,35.56 64.61,34.67 64.61,29.08 67.02,26.67 70.32,26.67 71.59,25.4 71.59,20.95 77.31,15.24 79.21,15.24
  Top 0.305: R8X21.1 86.07,17.14 | 86.07,17.14 JP4X21.4 | 79.21,15.24 84.16,15.24 86.07,17.14
IRSIG4X22  (1 unrouted)
  Top 0.254: ARDUINO1X22.AD3 65.49,85.56 64.61,84.67 64.61,79.08 67.02,76.67 70.32,76.67 71.59,75.4 71.59,70.95 77.31,65.24 79.21,65.24
  Top 0.305: R8X22.1 86.07,67.14 | 86.07,67.14 JP4X22.4 | 79.21,65.24 84.16,65.24 86.07,67.14
L1X11  (1 unrouted)
  Top 0.254: R9X11.1 14.35,13.34 15.88,13.34 19.05,16.51 ARDUINO1X11.D10
L1X12  (1 unrouted)
  Top 0.254: R9X12.1 14.35,63.34 15.88,63.34 19.05,66.51 ARDUINO1X12.D10
L1X21  (1 unrouted)
  Top 0.254: R9X21.1 64.35,13.34 65.88,13.34 69.05,16.51 ARDUINO1X21.D10
L1X22  (1 unrouted)
  Top 0.254: R9X22.1 64.35,63.34 65.88,63.34 69.05,66.51 ARDUINO1X22.D10
L2X11  (1 unrouted)
  Top 0.254: R10X11.1 12.7,14.61 15.61,14.61 17.78,16.77 17.78,19.05 ARDUINO1X11.D11
L2X12  (1 unrouted)
  Top 0.254: R10X12.1 12.7,64.61 15.61,64.61 17.78,66.78 17.78,69.05 ARDUINO1X12.D11
L2X21  (1 unrouted)
  Top 0.254: R10X21.1 62.7,14.61 65.61,14.61 67.78,16.77 67.78,19.05 ARDUINO1X21.D11
L2X22  (1 unrouted)
  Top 0.254: R10X22.1 62.7,64.61 65.61,64.61 67.78,66.78 67.78,69.05 ARDUINO1X22.D11
L3X11  (1 unrouted)
  Top 0.254: R11X11.1 12.7,16.77 12.7,21.59 13.97,22.86 ARDUINO1X11.D12
L3X12  (1 unrouted)
  Top 0.254: R11X12.1 12.7,66.78 12.7,71.59 13.97,72.86 ARDUINO1X12.D12
L3X21  (1 unrouted)
  Top 0.254: R11X21.1 62.7,16.77 62.7,21.59 63.97,22.86 ARDUINO1X21.D12
L3X22  (1 unrouted)
  Top 0.254: R11X22.1 62.7,66.78 62.7,71.59 63.97,72.86 ARDUINO1X22.D12
L4X11  (1 unrouted)
  Top 0.254: R12X11.1 6.35,12.7 8.89,15.24 8.89,20.32 13.97,25.4 ARDUINO1X11.D13
L4X12  (1 unrouted)
  Top 0.254: R12X12.1 6.35,62.7 8.89,65.24 8.89,70.32 13.97,75.4 ARDUINO1X12.D13
L4X21  (1 unrouted)
  Top 0.254: R12X21.1 56.35,12.7 58.89,15.24 58.89,20.32 63.97,25.4 ARDUINO1X21.D13
L4X22  (1 unrouted)
  Top 0.254: R12X22.1 56.35,62.7 58.89,65.24 58.89,70.32 63.97,75.4 ARDUINO1X22.D13
N$1X11  (1 unrouted)
  Top 0.254: LED5X11.C 2.54,11.18
N$1X12  (1 unrouted)
  Top 0.254: LED5X12.C 2.54,61.18
N$1X21  (1 unrouted)
  Top 0.254: LED5X21.C 52.54,11.18
N$1X22  (1 unrouted)
  Top 0.254: LED5X22.C 52.54,61.18
N$2X11  (1 unrouted)
  Top 0.254: 33.91,43.18 38.23,43.18 JP1X11.2
N$2X12  (1 unrouted)
  Top 0.254: 33.91,93.18 38.23,93.18 JP1X12.2
N$2X21  (1 unrouted)
  Top 0.254: R1X21.2 88.23,43.18 JP1X21.2
N$2X22  (1 unrouted)
  Top 0.254: R1X22.2 88.23,93.18 JP1X22.2
N$3X11  (1 unrouted)
  Top 0.254: 33.91,35.56 38.23,35.56 JP2X11.2
N$3X12  (1 unrouted)
  Top 0.254: 33.91,85.56 38.23,85.56 JP2X12.2
N$3X21  (1 unrouted)
  Top 0.254: R2X21.2 88.23,35.56 JP2X21.2
N$3X22  (1 unrouted)
  Top 0.254: R2X22.2 88.23,85.56 JP2X22.2
N$4X11  (1 unrouted)
  Top 0.254: 33.91,27.94 38.23,27.94 JP3X11.2
N$4X12  (1 unrouted)
  Top 0.254: 33.91,77.94 38.23,77.94 JP3X12.2
N$4X21  (1 unrouted)
  Top 0.254: R3X21.2 88.23,27.94 JP3X21.2
N$4X22  (1 unrouted)
  Top 0.254: R3X22.2 88.23,77.94 JP3X22.2
N$5X11  (1 unrouted)
  Top 0.254: 34.04,20.32 38.23,20.32 JP4X11.2
N$5X12  (1 unrouted)
  Top 0.254: 34.04,70.32 38.23,70.32 JP4X12.2
N$5X21  (1 unrouted)
  Top 0.254: 84.04,20.32 88.23,20.32 JP4X21.2
N$5X22  (1 unrouted)
  Top 0.254: 84.04,70.32 88.23,70.32 JP4X22.2
N$10X11  (1 unrouted)
  Top 0.254: LED1X11.C 13.97,11.18
N$10X12  (1 unrouted)
  Top 0.254: LED1X12.C 13.97,61.18
N$10X21  (1 unrouted)
  Top 0.254: LED1X21.C 63.97,11.18
N$10X22  (1 unrouted)
  Top 0.254: LED1X22.C 63.97,61.18
N$11X11  (1 unrouted)
  Top 0.254: LED2X11.C 11.43,11.18
N$11X12  (1 unrouted)
  Top 0.254: LED2X12.C 11.43,61.18
N$11X21  (1 unrouted)
  Top 0.254: LED2X21.C 61.43,11.18
N$11X22  (1 unrouted)
  Top 0.254: LED2X22.C 61.43,61.18
N$12X11  (1 unrouted)
  Top 0.254: LED3X11.C 8.89,11.18
N$12X12  (1 unrouted)
  Top 0.254: LED3X12.C 8.89,61.18
N$12X21  (1 unrouted)
  Top 0.254: LED3X21.C 58.89,11.18
N$12X22  (1 unrouted)
  Top 0.254: LED3X22.C 58.89,61.18
N$13X11  (1 unrouted)
  Top 0.254: LED4X11.C 6.35,11.18
N$13X12  (1 unrouted)
  Top 0.254: LED4X12.C 6.35,61.18
N$13X21  (1 unrouted)
  Top 0.254: LED4X21.C 56.35,11.18
N$13X22  (1 unrouted)
  Top 0.254: LED4X22.C 56.35,61.18
T1X11
  Bottom 0.254: ARDUINO1X11.D6 1.78,25.4 0.89,24.51 0.89,13.08 4.45,9.53 CON1X11.2
T1X12
  Bottom 0.254: ARDUINO1X12.D6 1.78,75.4 0.89,74.51 0.89,63.08 4.45,59.52 CON1X12.2
T1X21
  Bottom 0.254: ARDUINO1X21.D6 51.78,25.4 50.89,24.51 50.89,13.08 54.45,9.53 CON1X21.2
T1X22
  Bottom 0.254: ARDUINO1X22.D6 51.78,75.4 50.89,74.51 50.89,63.08 54.45,59.52 CON1X22.2
T2X11
  Bottom 0.254: ARDUINO1X11.D7 3.94,22.86 5.08,21.72 5.08,19.56 4.57,19.05 2.79,19.05 2.41,18.67 2.41,14.1 4.7,11.81 17.27,11.81 18.8,13.34 20.83,13.34 22.1,12.06 CON1X11.3
T2X12
  Bottom 0.254: ARDUINO1X12.D7 3.94,72.86 5.08,71.72 5.08,69.56 4.57,69.05 2.79,69.05 2.41,68.67 2.41,64.1 4.7,61.81 17.27,61.81 18.8,63.34 20.83,63.34 22.1,62.06 CON1X12.3
T2X21
  Bottom 0.254: ARDUINO1X21.D7 53.94,22.86 55.08,21.72 55.08,19.56 54.57,19.05 52.79,19.05 52.41,18.67 52.41,14.1 54.7,11.81 67.27,11.81 68.8,13.34 70.83,13.34 72.1,12.06 CON1X21.3
T2X22
  Bottom 0.254: ARDUINO1X22.D7 53.94,72.86 55.08,71.72 55.08,69.56 54.57,69.05 52.79,69.05 52.41,68.67 52.41,64.1 54.7,61.81 67.27,61.81 68.8,63.34 70.83,63.34 72.1,62.06 CON1X22.3
T3X11
  Bottom 0.254: ARDUINO1X11.D8 2.92,20.32 1.52,18.92 1.52,13.46 4.19,10.79 22.23,10.79 CON1X11.4
T3X12
  Bottom 0.254: ARDUINO1X12.D8 2.92,70.32 1.52,68.92 1.52,63.46 4.19,60.8 22.23,60.8 CON1X12.4
T3X21
  Bottom 0.254: ARDUINO1X21.D8 52.92,20.32 51.52,18.92 51.52,13.46 54.19,10.79 72.22,10.79 CON1X21.4
T3X22
  Bottom 0.254: ARDUINO1X22.D8 52.92,70.32 51.52,68.92 51.52,63.46 54.19,60.8 72.22,60.8 CON1X22.4
T4X11
  Bottom 0.254: ARDUINO1X11.D9 3.81,14.22 5.08,12.95 17.53,12.95 18.54,13.97 22.86,13.97 CON1X11.5
T4X12
  Bottom 0.254: ARDUINO1X12.D9 3.81,64.22 5.08,62.95 17.53,62.95 18.54,63.97 22.86,63.97 CON1X12.5
T4X21
  Bottom 0.254: ARDUINO1X21.D9 53.81,14.22 55.08,12.95 67.53,12.95 68.54,13.97 72.86,13.97 CON1X21.5
T4X22
  Bottom 0.254: ARDUINO1X22.D9 53.81,64.22 55.08,62.95 67.53,62.95 68.54,63.97 72.86,63.97 CON1X22.5
VCCX11  (10 unrouted)
  Top 0.254: LED5X11.A 2.02,6.87 | 21.84,15.24 23.15,15.24 | LED1X11.A 14.49,6.87
  Top 0.61: 19.05,6.99 19.05,11.43 CON1X11.1 19.68,13.08 21.84,15.24 | 14.49,6.87 17.14,6.99 19.05,6.99 | 2.02,6.87 0.89,8 0.89,13.59 2.54,15.24 4.45,15.24 6.35,17.14 6.35,33.02 12.06,38.73 18.41,38.73 ARDUINO1X11.5V 21.38,40.42 22.86,40.42 | LED5X11.A LED1X11.A | JP1X11.1 43.81,11.86 C3X11.+ | JP4X11.3 38.73,13.03 C3X11.+ | 19.05,6.99 38.94,6.99 C3X11.+
  Bottom 0.61: JP4X11.3 JP1X11.3
VCCX12  (10 unrouted)
  Top 0.254: LED5X12.A 2.02,56.87 | 21.84,65.24 23.15,65.24 | LED1X12.A 14.49,56.87
  Top 0.61: 19.05,56.98 19.05,61.43 CON1X12.1 19.68,63.08 21.84,65.24 | 14.49,56.87 17.14,56.98 19.05,56.98 | 2.02,56.87 0.89,58 0.89,63.59 2.54,65.24 4.45,65.24 6.35,67.14 6.35,83.02 12.06,88.73 18.41,88.73 ARDUINO1X12.5V 21.38,90.42 22.86,90.42 | LED5X12.A LED1X12.A | JP1X12.1 43.81,61.86 C3X12.+ | JP4X12.3 38.73,63.03 C3X12.+ | 19.05,56.98 38.94,56.98 C3X12.+
  Bottom 0.61: JP4X12.3 JP1X12.3
VCCX21  (10 unrouted)
  Top 0.254: LED5X21.A 52.02,6.87 | 71.84,15.24 73.15,15.24 | LED1X21.A 64.49,6.87
  Top 0.61: 69.05,6.99 69.05,11.43 CON1X21.1 69.69,13.08 71.84,15.24 | 64.49,6.87 67.14,6.99 69.05,6.99 | 52.02,6.87 50.89,8 50.89,13.59 52.54,15.24 54.45,15.24 56.35,17.14 56.35,33.02 62.06,38.73 68.42,38.73 ARDUINO1X21.5V 71.38,40.42 72.86,40.42 | LED5X21.A LED1X21.A | JP1X21.1 93.81,11.86 C3X21.+ | JP4X21.3 88.73,13.03 C3X21.+ | 69.05,6.99 88.94,6.99 C3X21.+
  Bottom 0.61: JP4X21.3 JP1X21.3
VCCX22  (10 unrouted)
  Top 0.254: LED5X22.A 52.02,56.87 | 71.84,65.24 73.15,65.24 | LED1X22.A 64.49,56.87
  Top 0.61: 69.05,56.98 69.05,61.43 CON1X22.1 69.69,63.08 71.84,65.24 | 64.49,56.87 67.14,56.98 69.05,56.98 | 52.02,56.87 50.89,58 50.89,63.59 52.54,65.24 54.45,65.24 56.35,67.14 56.35,83.02 62.06,88.73 68.42,88.73 ARDUINO1X22.5V 71.38,90.42 72.86,90.42 | LED5X22.A LED1X22.A | JP1X22.1 93.81,61.86 C3X22.+ | JP4X22.3 88.73,63.03 C3X22.+ | 69.05,56.98 88.94,56.98 C3X22.+
  Bottom 0.61: JP4X22.3 JP1X22.3

## Text on the board
tPlace: nc | nc | nc | nc | NPN Photo / Transistor | NPN Photo / Transistor | nc | nc | IR Q | IR LED | IR Q | IR LED | nc | nc | - | + | - | + | nc | nc | - | + | - | + | 1 | 1 | nc | nc | 1 | 1 | 2 | 2 | 2 | 2 | 3 | 3 | 4 | 4 | 1 | 1 | 2 | 2 | 3 | 3 | 3 | 3 | nc | nc | nc | nc | nc | nc | 4 | 4 | 4 | 4 | 2017.11 | 2017.11 | Open Source | John Plocher | Open Source | John Plocher | Activity | 4 | 3 | 2 | 1 | Activity | 4 | 3 | 2 | 1 | IR Detector | IR Detector | v3.1 | v3.1 | Hardware | Hardware | nc | nc | nc | nc | NPN Photo / Transistor | NPN Photo / Transistor | nc | nc | IR Q | IR LED | IR Q | IR LED | nc | nc | - | + | - | + | nc | nc | - | + | - | + | 1 | 1 | nc | nc | 1 | 1 | 2 | 2 | 2 | 2 | 3 | 3 | 4 | 4 | 1 | 1 | 2 | 2 | 3 | 3 | 3 | 3 | nc | nc | nc | nc | nc | nc | 4 | 4 | 4 | 4 | 2017.11 | 2017.11 | Open Source | John Plocher | Open Source | John Plocher | Activity | 4 | 3 | 2 | 1 | Activity | 4 | 3 | 2 | 1 | IR Detector | IR Detector | v3.1 | v3.1 | Hardware | Hardware
bPlace: Model Railroading is fun! | Model Railroading is fun! | Infrared Emitter IR 940nm | Infrared Emitter IR 940nm | - | + | - | + | - | + | - | + | #1 | #1 | #2 | #2 | #3 | #3 | Go Bears! | Go Bears! | #4 | #4 | Auto compensates for / changes in ambient light | Auto compensates for / changes in ambient light | IR Detector - Active | IR Detector - Active | www. | www. | SP Coast | SP Coast | .com | +5v | #1 | #2 | #3 | #4 | GND | .com | +5v | #1 | #2 | #3 | #4 | GND | Made in the PCR, Coast Division, NMRA | Made in the PCR, Coast Division, NMRA | Model Railroading is fun! | Model Railroading is fun! | Infrared Emitter IR 940nm | Infrared Emitter IR 940nm | - | + | - | + | - | + | - | + | CON1 | CON1 | #1 | #1 | #2 | #2 | #3 | #3 | Go Bears! | Go Bears! | #4 | #4 | Auto compensates for / changes in ambient light | Auto compensates for / changes in ambient light | IR Detector - Active | IR Detector - Active | www. | www. | SP Coast | SP Coast | .com | +5v | #1 | #2 | #3 | #4 | GND | .com | +5v | #1 | #2 | #3 | #4 | GND | Made in the PCR, Coast Division, NMRA | Made in the PCR, Coast Division, NMRA | CON1 | CON1
Milling: V-Score | V-Score | V-Score | V-Score
Document: Silicon NPN Phototransistor | Silicon NPN Phototransistor | Infrared Emitters IR 940nm | Infrared Emitters IR 940nm | Silicon NPN Phototransistor | Silicon NPN Phototransistor | Infrared Emitters IR 940nm | Infrared Emitters IR 940nm
_tNames: R1 | JP1 | R1 | JP1 | C2 | Q1 | C2 | Q1 | R5 | R5 | JP2 | JP2 | R2 | R2 | Q2 | Q2 | R6 | R6 | JP3 | JP3 | R3 | R3 | Q3 | Q3 | R7 | R7 | JP4 | JP4 | R4 | R4 | Q4 | Q4 | R8 | R8 | C1 | C1 | R14 | R12 | R11 | R10 | R9 | R14 | R12 | R11 | R10 | R9 | C3 | C3 | LED5 | LED4 | LED3 | LED2 | LED1 | LED5 | LED4 | LED3 | LED2 | LED1 | CON1 | CON1 | R1 | JP1 | R1 | JP1 | C2 | Q1 | C2 | Q1 | R5 | R5 | JP2 | JP2 | R2 | R2 | Q2 | Q2 | R6 | R6 | JP3 | JP3 | R3 | R3 | Q3 | Q3 | R7 | R7 | JP4 | JP4 | R4 | R4 | Q4 | Q4 | R8 | R8 | C1 | C1 | R14 | R12 | R11 | R10 | R9 | R14 | R12 | R11 | R10 | R9 | C3 | C3 | LED5 | LED4 | LED3 | LED2 | LED1 | LED5 | LED4 | LED3 | LED2 | LED1 | CON1 | CON1